# EAGLE board powermeter09 (EAGLE 9.1.3)
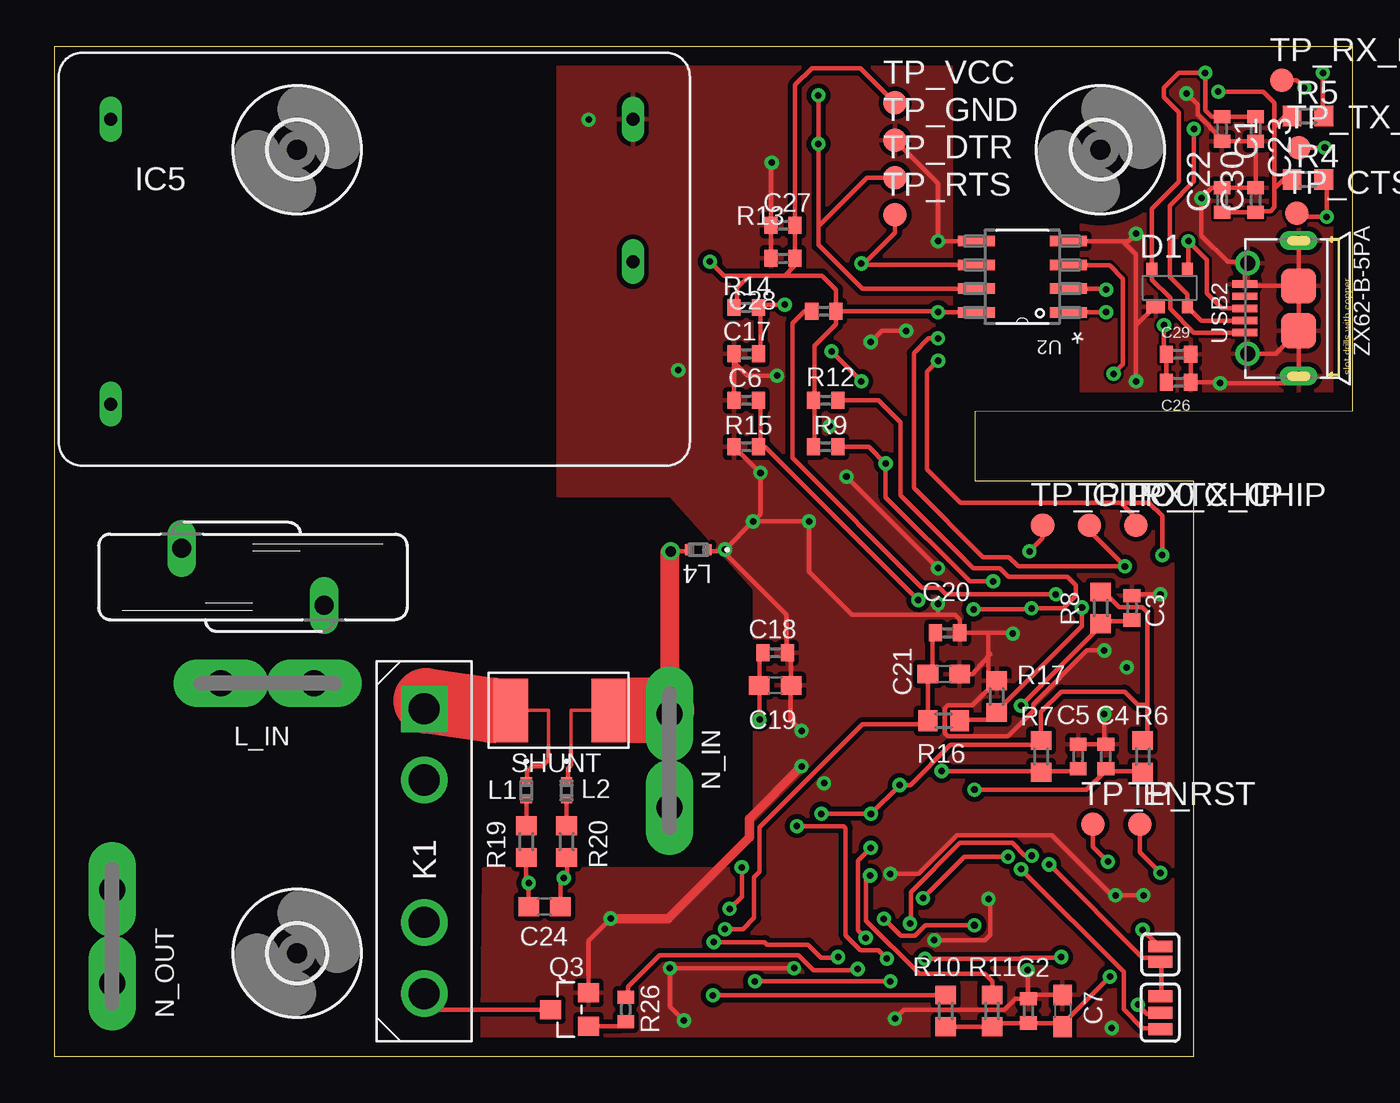
[diagram p0: board, top side]
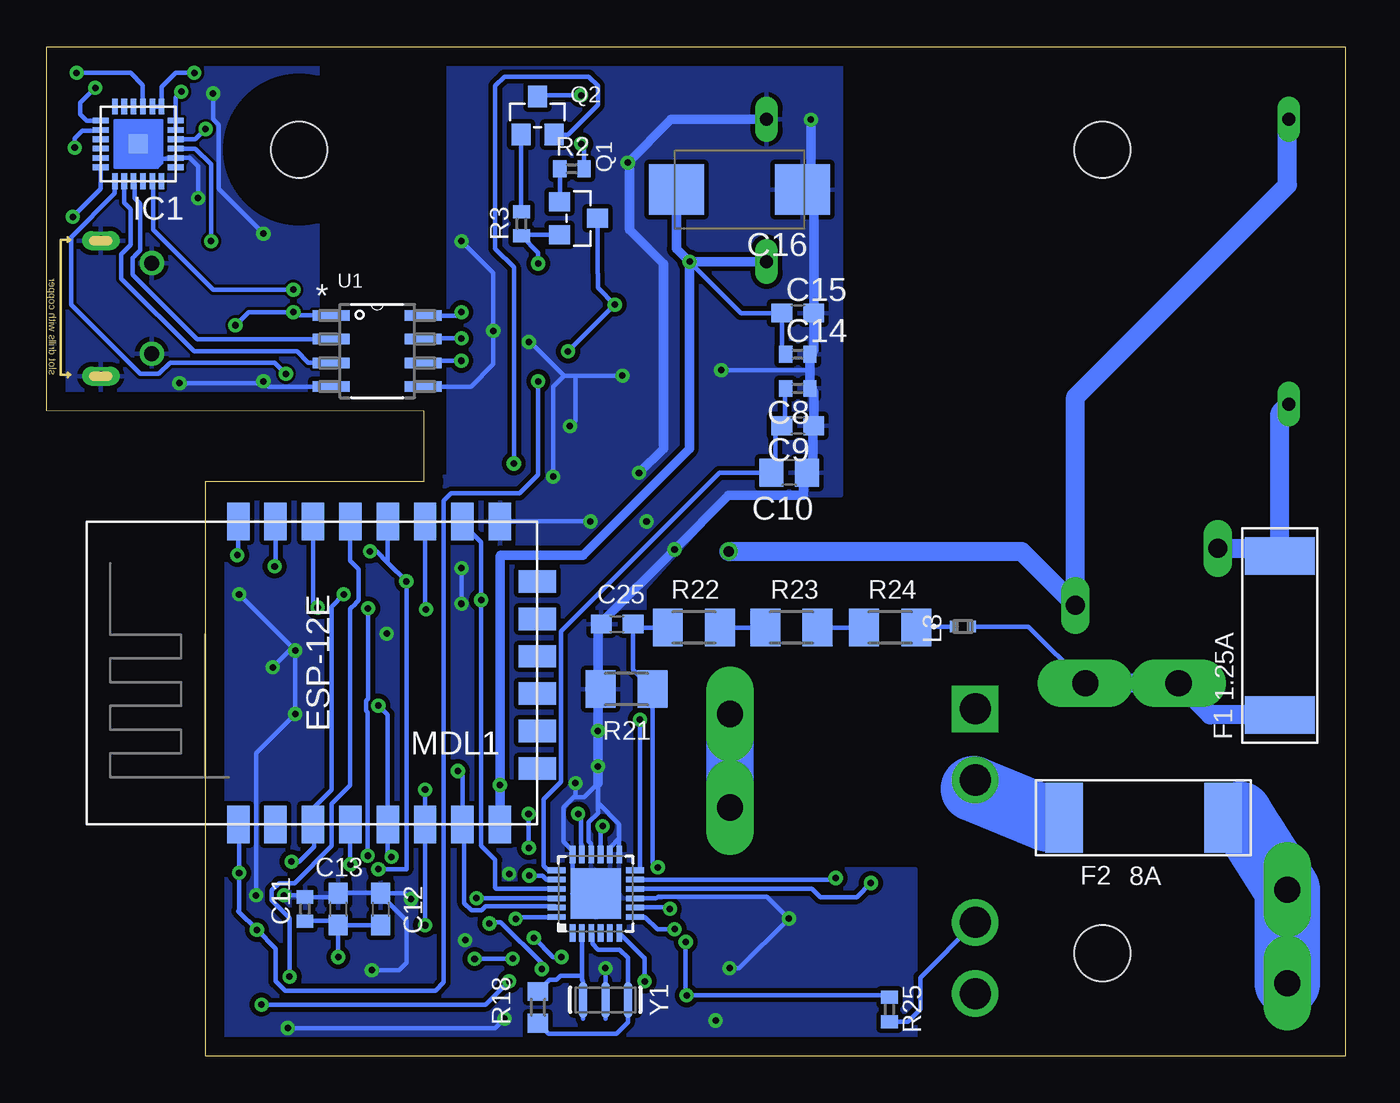
[diagram p1: board, bottom side, seen from below]

Size 69.5 x 54 mm. Coordinates in mm from the lower left corner, seen from the top.
Outline: 0,0 61,0 61,30.75 49.3,30.75 49.3,34.5 69.5,34.52 69.5,54 0,54 0,0
Copper layers (1*16): Top 0.035mm / dielectric 1.5mm / Bottom 0.035mm
Design rules "default": minimum track width 6mil, minimum drill 0.35mm, track to track 6mil, track to pad 6mil, pad to pad 6mil, via to via 6mil, smd to smd 6mil, copper to edge 40mil, drill to drill 6mil, minimum pad ring 10mil, minimum via ring 8mil, stop-mask expansion 4mil, vias tented up to drill 0mil, thermal gap 10mil
tKeepout: area 49.2,34.1 to 54,44.4
bKeepout: area 49.2,34.1 to 54,44.4

## Footprints (pad centres in the part's own frame; a part is rotated, then mirrored left to right if it is on the bottom)
C0402 = smd 0.7 x 0.9: 1 -0.65,0; 2 0.65,0
C0603 = smd 1.1 x 1: 1 -0.85,0; 2 0.85,0
C0805 = smd 1.3 x 1.5: 1 -0.95,0; 2 0.95,0
D/7343-31W = smd 2.95 x 2.7: + 3.375,0; - -3.375,0
SOT143-4-R = smd 1 x 0.7: 1 -0.75,-1 | smd 0.6 x 0.7: 2 0.95,-1; 3 0.95,1; 4 -0.95,1
SMD_FUSE = smd 2 x 3.75: P$1 -8.5,0; P$2 0,0
3,0 = hole 3: 0,0
QFN24 = smd 0.85 x 0.3: 1 -2,1.25; 2 -2,0.75; 3 -2,0.25; 4 -2,-0.25; 5 -2,-0.75; 6 -2,-1.25; 13 2,-1.25; 14 2,-0.75; 15 2,-0.25; 16 2,0.25; 17 2,0.75; 18 2,1.25 | smd 0.3 x 0.85: 7 -1.25,-2; 8 -0.75,-2; 9 -0.25,-2; 10 0.25,-2; 11 0.75,-2; 12 1.25,-2; 19 1.25,2; 20 0.75,2; 21 0.25,2; 22 -0.25,2; 23 -0.75,2; 24 -1.25,2 | smd 1.02 x 1.02: PAD 0,0
MW_IRM-02 = drill 0.7 long: +V 13.97,0; -V 13.97,7.62; AC/L -13.97,-7.62; AC/N -13.97,7.62
TO381P516X1991X2388-4P = drill 1.66 pad 2.49 square: 1 -1.27,0 | drill 1.66 pad 2.49: 2 2.54,0; 3 10.16,0; 4 13.97,0
IND_1005 = smd 0.423 x 0.6: 1 -0.492,0; 2 0.492,0
F061.100 = drill 1.4 pad 2.54 long: A1 -2.5,0; A2 2.5,0
ESP8266-ESP12E = smd 2 x 1.2: 1 -7.62,5.84; 2 -7.62,3.84; 3 -7.62,1.84; 4 -7.62,-0.16; 5 -7.62,-2.16; 6 -7.62,-4.16; 7 -7.62,-6.16; 8 -7.62,-8.16; 9 8.58,-8.16; 10 8.58,-6.16; 11 8.58,-4.16; 12 8.58,-2.16; 13 8.58,-0.16; 14 8.58,1.84; 15 8.58,3.84; 16 8.58,5.84 | smd 1.2 x 2: 17 -4.62,-10.16; 18 -2.62,-10.16; 19 -0.62,-10.16; 20 1.38,-10.16; 21 3.38,-10.16; 22 5.38,-10.16
SOT-23 = smd 1.016 x 1.143: 1 -0.889,-1.016; 2 0.889,-1.016; 3 0,1.016
S14K250 = drill 1.016 long: 1 -1.524,-3.81; 2 1.524,3.81
R0402 = smd 0.7 x 0.9: 1 -0.65,0; 2 0.65,0
R0603 = smd 1 x 1.1: 1 -0.85,0; 2 0.85,0
M1206 = smd 1.6 x 2: 1 -1.4,0; 2 1.4,0
SMD_SHUNT = smd 1.8 x 3.4: I_IN 0.2,0; I_OUT 5.4,0 | smd 0.203 x 0.406: SEN1 2.2,-2.3; SEN2 3.4,-2.3
SJ_3 = smd 0.635 x 1.27: 1 -0.889,0; 2 0,0; 3 0.889,0
SJ_2S = smd 0.635 x 1.27: 1 -0.412,0; 2 0.412,0
B1,27 = smd 1.27 x 1.27: TP 0,0
SOIC_8_PASCAL = smd 1.981 x 0.559: 1 0.076,-0.635; 2 0.076,-1.905; 3 0.076,-3.175; 4 0.076,-4.445; 5 5.004,-4.445; 6 5.004,-3.175; 7 5.004,-1.905; 8 5.004,-0.635
QFN24' = smd 0.95 x 0.3: 1 -2.1,1.25; 2 -2.1,0.75; 3 -2.1,0.25; 4 -2.1,-0.25; 5 -2.1,-0.75; 6 -2.1,-1.25; 13 2.1,-1.25; 14 2.1,-0.75; 15 2.1,-0.25; 16 2.1,0.25; 17 2.1,0.75; 18 2.1,1.25 | smd 0.3 x 0.95: 7 -1.25,-2.1; 8 -0.75,-2.1; 9 -0.25,-2.1; 10 0.25,-2.1; 11 0.75,-2.1; 12 1.25,-2.1; 19 1.25,2.1; 20 0.75,2.1; 21 0.25,2.1; 22 -0.25,2.1; 23 -0.75,2.1; 24 -1.25,2.1 | smd 2.7 x 2.7: EXP 0,0
MICRO-USB5+6P-SMD-0.65-AB = smd 0.4 x 1.35: 1 -1.3,2.875; 2 -0.65,2.875; 3 0,2.875; 4 0.65,2.875; 5 1.3,2.875 | smd 1.9 x 1.9: P1 -1.2,0; P2 1.2,0 | drill 0.508 pad 1.016 long: P3 -3.625,0; P4 3.625,0 | drill 0.8: P5 -2.425,2.73; P6 2.425,2.73
RESONATOR-SMD-3.2X1.3 = smd 0.45 x 1.905: 1 -1.2,0; 2 0,0; 3 1.2,0

## Placement (x,y rotation side)
C1  100n  [C0402]  62.5,49.6 270 top
C2  150p  [C0402]  52.14,2.42 270 top
C3  150p  [C0402]  57.68,23.98 270 top
C4  150p  [C0402]  56.28,16.03 270 top
C5  150p  [C0402]  54.8,16.03 270 top
C6  150p  [C0402]  37.03,35.08 0 top
C7  10n  [C0603]  53.96,2.42 270 top
C8  150p  [C0402]  29.3,35.72 180 bottom
C9  100n  [C0603]  29.3,33.72 180 bottom
C10  4.7u  [C0805]  29.76,31.22 180 bottom
C11  150p  [C0402]  55.68,7.86 270 bottom
C12  100n  [C0603]  51.63,7.86 270 bottom
C13  1u  [C0603]  53.91,7.86 270 bottom
C14  150p  [C0402]  29.3,37.55 0 bottom
C15  100n  [C0603]  29.3,39.75 0 bottom
C16  100u  [D/7343-31W]  32.42,46.36 180 bottom
C17  150p  [C0402]  37.03,37.57 180 top
C18  150p  [C0402]  38.59,21.58 180 top
C19  100n  [C0603]  38.59,19.83 180 top
C20  150p  [C0402]  47.81,22.64 180 top
C21  100n  [C0603]  47.61,20.44 180 top
C22  100n  [C0402]  62.5,45.8 90 top
C23  4.7u  [C0402]  64.3,49.6 270 top
C24  10n  [C0603]  26.24,7.99 180 top
C25  22n  [C0603]  38.97,23.11 0 bottom
C26  100n  [C0402]  60.17,36.05 180 top
C27  100n  [C0402]  39.01,44.45 0 top
C28  100n  [C0402]  39.01,42.68 0 top
C29  100n  [C0402]  60.17,37.55 180 top
C30  4.7u  [C0402]  64.3,45.8 90 top
D1  SP0503BAHTG  [SOT143-4-R]  59.7,41.1 0 top
F1  1.25A  [SMD_FUSE]  3.5,26.75 90 bottom
F2  8A  [SMD_FUSE]  15.05,12.75 180 bottom
H1  MOUNT-HOLE3.0  [3,0]  56,48.5 0 top
H3  MOUNT-HOLE3.0  [3,0]  13,48.5 0 top
H4  MOUNT-HOLE3.0  [3,0]  13,5.5 0 top
IC1  CP2102N-QFN24  [QFN24]  64.6,48.8 180 bottom
IC5  IRM-02-3.3  [MW_IRM-02]  17,42.5 0 top
K1  CPC1998J  [TO381P516X1991X2388-4P]  19.8,17.31 270 top
L1  MMZ1005A152ET000  [IND_1005]  25.27,14.22 270 top
L2  MMZ1005A152ET000  [IND_1005]  27.42,14.22 270 top
L3  MMZ1005A152ET000  [IND_1005]  20.47,22.98 0 bottom
L4  MMZ1005A152ET000  [IND_1005]  34.47,27.09 180 top
L_IN  PIN2F061.100  [F061.100]  11.42,19.94 180 top
MDL1  [ESP8266-ESP12E]  53.41,20.01 90 bottom
N_IN  PIN2F061.100  [F061.100]  32.94,15.8 90 top
N_OUT  PIN2F061.100  [F061.100]  3.1,6.4 90 top
Q1  S8050  [SOT-23]  41.04,44.82 270 bottom
Q2  S8050  [SOT-23]  43.24,50.32 0 bottom
Q3  S8050  [SOT-23]  27.58,2.49 90 top
R1  S14K250  [S14K250]  10.63,25.64 270 top
R2  12k  [R0402]  41.39,47.47 0 bottom
R3  12k  [R0402]  44.09,44.53 270 bottom
R4  10k  [R0603]  67.1,46.9 0 top
R5  1k  [R0603]  67.1,50.3 0 top
R6  10k  [R0603]  58.26,16.03 90 top
R7  10k  [R0603]  52.82,16.03 90 top
R8  10k  [R0603]  56.01,23.98 90 top
R9  12k  [R0402]  41.29,32.6 0 top
R10  10k  [R0603]  47.71,2.42 90 top
R11  100R  [R0603]  50.19,2.42 270 top
R12  12k  [R0402]  41.29,35.08 0 top
R13  12k  [R0402]  41.19,39.85 180 top
R14  12k  [R0402]  37.03,40.05 0 top
R15  12k  [R0402]  37.03,32.6 180 top
R16  100RR3  [R0603]  47.61,17.94 0 top
R17  22k  [R0603]  50.44,19.23 270 top
R18  1M  [R0603]  43.21,2.61 270 bottom
R19  1k  [R0603]  25.27,11.47 270 top
R20  1k  [R0603]  27.42,11.47 270 top
R21  470R  [M1206]  38.47,19.63 0 bottom
R22  270k  [M1206]  34.86,22.93 0 bottom
R23  270k  [M1206]  29.64,22.93 0 bottom
R24  270k  [M1206]  24.36,22.93 0 bottom
R25  220  [R0402]  24.4,2.49 90 bottom
R26  10k  [R0402]  30.59,2.49 90 top
SHUNT  WSLF2512L3000FEA  [SMD_SHUNT]  24.25,18.5 0 top
SJ1  0 / INT1 /16  [SJ_3]  59.2,2.32 90 top
SJ2  sleep mode  [SJ_2S]  59.2,5.45 270 top
TP_CTS_PORT  TPB1,27  [B1,27]  66.5,45.1 0 top
TP_DTR  TPB1,27  [B1,27]  45,47 0 top
TP_EN  TPB1,27  [B1,27]  55.6,12.4 0 top
TP_GIPO0  TPB1,27  [B1,27]  52.9,28.4 0 top
TP_GND  TPB1,27  [B1,27]  45,49 0 top
TP_RST  TPB1,27  [B1,27]  58.1,12.4 0 top
TP_RTS  TPB1,27  [B1,27]  45,45 0 top
TP_RX_CHIP  TPB1,27  [B1,27]  55.4,28.4 0 top
TP_RX_PORT  TPB1,27  [B1,27]  65.7,52.2 0 top
TP_TX_CHIP  TPB1,27  [B1,27]  57.9,28.4 0 top
TP_TX_PORT  TPB1,27  [B1,27]  66.6,48.6 0 top
TP_VCC  TPB1,27  [B1,27]  45,51 0 top
U1  SI8621BB-B-IS  [SOIC_8_PASCAL]  54.35,40.26 0 bottom
U2  SI8620BB-B-IS  [SOIC_8_PASCAL]  54.35,39.15 180 top
U$1  STPM32SMD  [QFN24']  40.11,8.69 90 bottom
USB2  ZX62-B-5PA  [MICRO-USB5+6P-SMD-0.65-AB]  66.6,40 90 top
Y1  CSTCE16M0V53-R0  [RESONATOR-SMD-3.2X1.3]  39.6,3 0 bottom

## Library data of the parts
C1-C30 = rcl
D1 = littelfuse_greg; OC_MOUSER: 576-SP0503BAHTG
F1 F2 SHUNT U1 U2 U$1 = _powermeter
H1 H3 H4 = holes
IC1 = silabs_greg; OC_MOUSER: 634-CP2102NA01GQFN24
IC5 = reichelt_power; OC_MOUSER: 709-IRM02-3.3
K1 = CPC1998J; DESCRIPTION: Solid State Relays - PCB Mount SP AC Solid State Power Switch; HEIGHT: 5.156mm; MANUFACTURER_NAME: IXYS SEMICONDUCTOR; MANUFACTURER_PART_NUMBER: CPC1998J; SUPPLIER_NAME: RS
L1-L4 = _powermeter; MANUFACTURER_PART_NUMBER: MMZ1005A152ET000; VENDOR: TDK
L_IN N_IN N_OUT = con-faston; OC_FARNELL: unknown; OC_NEWARK: unknown
MDL1 = ESP8266-ESP12E
Q1-Q3 = Seeed-Transistor; MPN: S8050
R1 = varistor
R2-R26 = resistor
SJ1 SJ2 = SparkFun-Retired
TP_CTS_PORT TP_DTR TP_EN TP_GIPO0 TP_GND TP_RST TP_RTS TP_RX_CHIP TP_RX_PORT TP_TX_CHIP TP_TX_PORT TP_VCC = testpad
USB2 = Seeed-OPL-Connector; MPN: ZX62-B-5PA; OC_MOUSER: 649-10118193-0001LF
Y1 = SparkFun-Clocks

## Nets
+3V3: C14.1 C15.1 C16.+ C27.2 C28.2 IC5.+V MDL1.8 R6.2 R7.2 R8.2 R9.1 R10.2 R12.1 R13.1 R14.1 R25.2 TP_VCC.TP U1.8 U2.8 U$1.17
AC_L: F1.P$1 L3.2 L_IN.A1 L_IN.A2
AC_L_FUSE1.25A: F1.P$2 IC5.AC/L R1.1
AC_N: IC5.AC/N L4.2 N_IN.A1 N_IN.A2 R1.2 SHUNT.I_OUT
AC_N_SHUNT: K1.1 SHUNT.I_IN
ADC: MDL1.2
CLK: MDL1.22
CP2102_3.3V1: C22.1 C30.1 IC1.5 IC1.6 R4.1 R5.1
CS0: MDL1.17
DC_GND1: C18.2 C19.2 U$1.12
DC_GND2: C20.2 C21.2 R16.1 U$1.7
DTR: Q2.3 R2.2 TP_DTR.TP U2.7
EN: MDL1.3 R13.2 TP_EN.TP
GND: C2.1 C3.1 C4.1 C5.1 C6.1 C7.1 C8.1 C9.1 C10.1 C11.1 C12.1 C13.1 C14.2 C15.2 C16.- C17.2 C18.1 C19.1 C20.1 C21.1 C25.1 C27.1 C28.1 IC5.-V L4.1 MDL1.9 Q3.2 R15.2 R17.1 R21.1 TP_GND.TP U1.5 U2.5 U$1.9 U$1.13 U$1.14 U$1.16 U$1.18 U$1.EXP Y1.2
GPIO0: MDL1.12 Q2.2 R9.2 SJ1.1 TP_GIPO0.TP
GPIO2: MDL1.11 R12.2 R26.2
GPIO4: C2.2 C7.2 MDL1.13 R10.1 R11.2
GPIO5: MDL1.14 R16.2 R17.2
GPIO9: MDL1.19
GPIO10: MDL1.20
GPIO12: C4.2 MDL1.6 R6.1 U$1.24
GPIO13: C5.2 MDL1.7 R7.1 U$1.23
GPIO14: C3.2 MDL1.5 R8.1 U$1.22
GPIO15: C6.2 MDL1.10 R15.1 U$1.21
GPIO16: MDL1.4 SJ1.3 SJ2.2
INT1: SJ1.2 U$1.6
ISO_5V: C26.2 C29.2 U1.1 U2.1
ISO_DTR: IC1.23 U2.2
ISO_GND: C1.2 C22.2 C23.2 C26.1 C29.1 C30.2 D1.1 IC1.2 IC1.PAD U1.4 U2.4 USB2.5 USB2.P1 USB2.P2 USB2.P3 USB2.P4 USB2.P5 USB2.P6
ISO_RTS: IC1.19 U2.3
ISO_RX: IC1.21 U1.2
ISO_TX: IC1.20 U1.3
MISO: MDL1.18
MOSI: MDL1.21
N$1: Q1.1 R2.1
N$2: Q2.1 R3.1
N$3: C8.2 C9.2 C10.2 U$1.19
N$4: IC1.18 R4.2 TP_CTS_PORT.TP
N$5: IC1.9 R5.2
N$6: C11.2 C12.2 C13.2 U$1.15
N$7: R18.2 U$1.3 Y1.3
N$8: R18.1 U$1.2 Y1.1
N$9: C24.1 R20.2 U$1.11
N$10: R11.1 U$1.20
N$11: C24.2 R19.2 U$1.10
N$12: Q3.1 R26.1
N$13: C25.2 R21.2 R22.1 U$1.8
N$14: R23.2 R24.1
N$15: R22.2 R23.1
N$16: F2.P$2 K1.2
N$17: K1.4 Q3.3
N$18: K1.3 R25.1
N$19: L3.1 R24.2
N$20: IC1.14 TP_TX_PORT.TP
N$21: L1.2 R19.1
N$22: L2.2 R20.1
N$23: F2.P$1 N_OUT.A1 N_OUT.A2
N$24: L1.1 SHUNT.SEN1
N$25: L2.1 SHUNT.SEN2
N$26: IC1.13 TP_RX_PORT.TP
NRST: C17.1 MDL1.1 Q1.3 R14.2 SJ2.1 TP_RST.TP
RTS: Q1.2 R3.2 TP_RTS.TP U2.6
RXD0: MDL1.15 TP_RX_CHIP.TP U1.7
TXD0: MDL1.16 TP_TX_CHIP.TP U1.6
USB_D+1: D1.3 IC1.3 USB2.3
USB_D-1: D1.2 IC1.4 USB2.2
VBUS: C1.1 C23.1 D1.4 IC1.7 IC1.8 USB2.1

## Tracks (layer width: path | path; a pad name or v marks a point on that pad's centre or on a via)
+3V3  (via drill 0.35)
  Top 0.254: 53,17 R7.2 | 58.25,17 R6.2 58.5,17 58.5,18.8 | 58.5,18.8 58.5,23.75 58.25,24 57,24 56.25,24.75 R8.2 | R9.1 40.7,32.7 40.7,34.95 R12.1 40.7,35.2 40.7,38 41.84,39.14 R13.1 | R14.1 36.55,40.2 36.55,41.1 37.2,41.75 | 41.6,40 R13.1 | 41.6,39.75 R13.1 | 39.1,41.75 37.2,41.75 | 39.1,41.75 41.1,41.75 41.84,41.01 R13.1 | 37.2,41.75 35.84,41.75 v35.09,42.5 | 52.75,16.75 R7.2 | R7.2 52.82,18.42 53.9,19.5 57.3,19.5 58,18.8 58.5,18.8 | v41.06,12.96 v43.71,12.96 v45.25,14.5 45.82,14.5 47.98,16.66 52.6,16.66 R7.2 | 37.48,6.09 v35.31,6.09 v35.3,6.1 37.47,6.1 37.48,6.09 | 37.48,6.09 38.02,6.09 38.16,5.96 40.34,5.96 41.05,5.25 41.95,5.25 v41.95,5.3 | R10.2 47.69,3.25 v35.25,3.25 | v43.43,6.33 43.02,6.74 43.02,10.46 v43.7,11.14 | R13.1 41.84,40.21 | 39.1,41.75 39.66,42.3 C28.2 C27.2 39.66,51.95 40.56,52.86 43.14,52.86 TP_VCC.TP | R13.1 47.25,39.85 v47.3,39.8 49.33,39.8 U2.8
  Bottom 0.254: R25.2 24.5,3.25 v35.25,3.25 35.3,3.3 v35.3,6.1 | U$1.17 40.86,11.29 40.91,11.33 40.91,12.81 v41.06,12.96 | v41.95,5.3 42.4,5.3 v43.43,6.33 | v43.7,11.14 v43.7,12.95 v43.71,12.96 | U1.8 49.45,39.62 | C14.1 30.16,37.72 C15.1 | C15.1 | C15.1 32.34,39.75 v35.09,42.5 | 49.34,39.63 U1.8 | 47.4,39.8 v47.3,39.8 47.5,39.6 49.32,39.6 U1.8
  Bottom 0.508: 36.49,45.36 C16.+ | v35.1,42.49 v35.09,42.5 IC5.+V | v35.1,42.49 35.1,32.5 40.8,26.8 45.2,26.8 45.25,26.75 45.25,15.4 v45.25,14.5 MDL1.8 | 35.09,45.36 C16.+ | C16.+ 35.8,43.19 v35.1,42.49
AC_L
  Bottom 0.254: L3.2 16.96,22.98 L_IN.A1
  Bottom 1.016: L_IN.A1 L_IN.A2 7.23,18.25 F1.P$1
AC_L_FUSE1.25A
  Bottom 1.016: R1.1 3.91,27.16 F1.P$2 3.5,34.41 IC5.AC/L
AC_N  (via drill 0.55)
  Top 0.254: 32.94,16.56 N_IN.A2 | L4.2 33.89,27 v33,27
  Top 1.016: v33,27 32.94,26.94 N_IN.A2 32.7,17.8 32.5,18.5 | SHUNT.I_OUT 31,18.5
  Top 3.5: 31,18.5 32.5,18.5
  Bottom 1.016: IC5.AC/N 3.1,50.05 3.1,46.6 14.44,35.26 R1.2 17.32,27 v33,27
  Bottom 2.54: N_IN.A1 N_IN.A2
AC_N_SHUNT
  Top 1.016: SHUNT.I_IN 23.4,18.5 | K1.1 20.58,19.08 19.9,19
  Top 3.5: 23.4,18.5 19.9,19
CP2102_3.3V1  (via drill 0.35)
  Top 0.254: C22.1 C30.1 64.35,45.2 65.1,45.2 65.3,45.4 65.3,46.4 | v62.3,51.6 64.7,51.6 65.3,51 65.3,49.7 | 65.3,49.7 65.3,48.4 65.3,46.4 | R4.1 65.8,46.9 65.3,46.4 | R5.1 65.9,50.3 65.3,49.7
  Bottom 0.254: IC1.5 IC1.6 62.6,51.3 v62.3,51.6
DC_GND1  (via drill 0.35)
  Top 0.254: v37.75,18 37.75,19.75 C19.2 37.75,20 37.75,21.5 C18.2
  Bottom 0.254: U$1.12 37.75,10 v37.75,18
DC_GND2  (via drill 0.35)
  Top 0.254: C20.2 47,22.45 47,20.5 C21.2 46.75,20.25 46.75,18 R16.1 46.75,17.75 43.25,17.75 37.75,12.25 37.75,9.87 37.46,9.58 37.46,7.4 36.85,6.79 36.28,6.79 v35.89,6.79
  Bottom 0.254: U$1.7 37.47,7.44 36.82,6.79 36.28,6.79 v35.89,6.79
DTR  (via drill 0.35)
  Top 0.254: v40.9,51.4 40.9,49 41.1,48.8 v40.9,48.8 40.9,44.4 | U2.7 43.24,41.05 40.9,43.4 40.9,44.4 | TP_DTR.TP 43.5,47 40.9,44.4
  Bottom 0.254: v40.9,51.4 43.17,51.4 Q2.3 | R2.2 40.74,48.64 v40.9,48.8
EN  (via drill 0.35)
  Top 0.254: 40.35,39.75 R13.2 | R13.2 40.25,39.85 | R13.2 40.15,39.85 39.5,39.2 39.5,32 46.44,25.06 47.37,25.06 47.73,24.7 v53.6,24.7 | TP_EN.TP 55.6,11.2 v56.4,10.4
  Bottom 0.254: v53.6,24.7 54.25,24.05 54.25,14.25 55.25,13.25 MDL1.3 55.2,12.34 55.2,11.2 56,10.4 v56.4,10.4
GND  (via drill 0.35)
  Top 0.254: C28.1 C27.1 38.35,47.76 v38.4,47.8 | C18.1 39,21.75 | 52.06,3.17 C2.1 | 52.06,3.17 52,3.25 52.1,3.35 | Q3.2 28.6,6.17 v29.78,7.36 | C5.1 C4.1 56.2,16.76 v56.2,18.3 | v59.2,24.7 57.75,24.7 C3.1 | 50.01,21.4 50.01,20.51 R17.1 49.13,18.77 47.84,18.77 47.68,18.61 47.68,17.27 47.84,17.11 51.04,17.11 52.41,18.48 52.41,18.83 55.27,21.7 v56.2,21.7 | C21.1 49.15,20.44 50.01,21.4 | C20.1 50,22.64 50.01,22.63 50.01,21.6 | C6.1 C17.2 36.38,37.12 37.1,36.4 v38.69,36.4 | C2.1 52.34,3.27 C7.1 | 35.8,27 39.2,23.6 39.2,21.61 C18.1 | 35.8,27 v35.9,27.1 v37.4,28.6 | C18.1 39.44,21.38 C19.1 39.4,19.8 39.4,18 v40,17.4 | v52.1,4.6 52.1,3.21 52.06,3.17 | C2.1 51.44,3.07 50.86,2.49 45.49,2.49 v45,2 | v51.3,22.6 51.56,22.64 C20.1 | 50.01,21.6 50.01,21.4 | v39.6,4.7 v32.95,4.7 32.95,2.65 v33.7,1.9 | L4.1 35.05,27 35.8,27 | v37.4,28.6 v40.4,28.6 40.4,25.9 42.7,23.6 47.3,23.6 | C20.1 48.46,23.34 48.2,23.6 47.3,23.6 | 50.11,21.5 50.01,21.6 | 47.3,23.6 v47.3,24.2 | R15.2 37.78,31.2 v37.8,31.2 37.8,29 v37.4,28.6 | v45.6,38.8 44.3,38.8 v43.7,38.2 | U2.5 v47.3,43.6 47.3,46.7 TP_GND.TP | v47.1,6.2 49.8,6.2 50.1,6.5 50.1,8.3 v50,8.4 | v44.75,9.75 46.24,9.75 48.31,11.81 53.4,11.81 56.61,8.6 v56.8,8.6 v58.3,8.6 | v42.4,31 v47.3,26.1
  Top 0.508: v40,15.5 37.2,12.7 | 37.22,12.68 37.2,12.7 | 37.2,12.7 37.2,11.7 32.86,7.36 v29.78,7.36
  Bottom 0.254: 40,23 C25.1 39.75,23.25 | 40,19.75 R21.1 40,19.5 | 28.5,35.5 C8.1 28.75,35.75 | 28.5,33.75 C9.1 28.5,33.5 | 28.5,31.5 28.75,31.25 C10.1 29,31 | C12.1 51.75,8.75 53.75,8.75 C13.1 54,8.5 55.5,8.5 C11.1 55.77,8.6 v56.8,8.6 | 45.25,28.75 MDL1.9 v40.4,28.6 | C12.1 51.5,8.5 50.25,7.25 50.25,5 50.65,4.6 v52.1,4.6 | U$1.9 36.88,8.44 36.79,8.53 30.96,8.53 v29.78,7.36 32.44,4.7 v32.95,4.7 | 41.3,13.85 41.84,13.3 41.84,11.47 41.36,10.98 U$1.18 41.36,9.94 U$1.EXP | 41.3,13.85 40.76,13.85 40,14.6 40,13.55 | v58.3,8.6 58.3,16.2 v56.2,18.3 v56.2,21.7 | v56.2,21.7 v59.2,24.7 | v39.6,4.7 Y1.2 | U1.5 49.33,35.8 46.8,35.8 45.6,37 v45.6,38.8 45.6,41.9 v47.3,43.6 | U$1.13 38.86,11.65 | U$1.14 39.36,11.15 38.86,11.65 | U$1.16 40.36,11.36 40.5,11.5 40.5,12.5 40,13 40,13.55 | 40,13.55 38.86,12.41 38.86,11.65 | v33.4,36.7 28.65,36.7 | v38.69,36.4 41.2,36.4 | 41.2,36.4 41.2,34 v41.5,33.7 | v47.3,24.2 v47.3,26.1 | v43.7,38.2 43.6,38.2 41.8,36.4 | 41.2,36.4 41.8,36.4 | 41.8,36.4 42.4,35.8 v42.4,31 | v56.2,21.7 56.5,21.7 v57.4,20.8 | C12.1 50.31,8.71 v50,8.4 | v56.6,1.5 45.5,1.5 v45,2 | v41.2,14.6 41.2,13.95 41.3,13.85
  Bottom 0.508: 40,19.75 40,23 | 40,19.5 v40,17.4 v40,15.5 40,14.6 | 28.5,33.5 28.5,31.5 | 39.75,23.25 v35.9,27.1 33,30 29,30 29,31 | C16.- 29.2,46.51 | 28.61,37.47 C14.2 | 30.99,50.14 IC5.-V 36.08,50.12 v38.4,47.8 38.3,47.7 38.3,44.2 36.5,42.4 36.5,32.5 v37.8,31.2 | 28.46,45.48 C16.- | 28.6,46.51 C16.- | C14.2 28.45,37.75 C15.2 28.45,45.77 C16.- | C14.2 28.65,36.7 C8.1 28.45,35.52 C9.1 | v28.6,50.1 28.6,46.8 C16.-
  pour Top (isolate 0.254): 27,54 27,30 33,30 37.5,25 37.5,10 23,10 22.9,-1 61,-1 61,31 48,31 48,54
  pour Bottom (isolate 0.254): 27,54 27,30 33,30 37.5,25 37.5,10 23,10 23,-1 61,-1 61,31 48,31 48,54
GPIO0  (via drill 0.35)
  Top 0.254: 41.95,32.45 R9.2 43.6,32.6 v44.5,31.7 44.5,29.9 49,25.4 v50.25,25.4 | v51.75,10 57.25,4.5 57.25,2.5 58.25,1.5 59,1.5 SJ1.1 | TP_GIPO0.TP 52.9,27.7 v52.2,27
  Bottom 0.254: v51.75,10 50.25,10 v50.25,25.4 51.25,26.4 | 51.25,27.8 MDL1.12 51.25,26.4 | v44.5,31.7 44.5,42.2 45.5,43.2 45.5,51.9 45,52.4 40.5,52.4 40,51.9 40,50.9 41.6,49.3 Q2.2 | v52.2,27 51.85,27 51.25,26.4
GPIO2  (via drill 0.35)
  Top 0.254: 41.95,34.95 R12.2 44.12,35.08 45.3,33.9 45.3,30 49.2,26.1 50.6,26.1 51.06,25.64 54.23,25.64 54.69,25.18 54.69,24.61 54.02,23.95 v52.3,23.95 52.25,23.9 v49.2,23.9 | v52.32,10.72 51.96,10.72 51.27,11.41 48.48,11.41 45.84,8.77 45.84,7.13 v45.8,7.09 | R26.2 30.7,3.25 30.7,3.7 32.4,5.4 39.83,5.4 40.63,4.6 42.94,4.6 v43,4.66
  Bottom 0.254: v52.3,23.95 52.3,19.13 52.41,19.02 52.41,18.48 52.32,18.39 v52.32,10.72 | v43,4.66 43,4.96 45.2,7.16 45.73,7.16 v45.8,7.09 | MDL1.11 49.25,23.95 v49.2,23.9
GPIO4  (via drill 0.35)
  Top 0.254: 50.6,1.75 50.5,1.75 | 50.6,1.75 52,1.75 C2.2 52.25,1.75 53.75,1.75 C7.2 54,1.75 v56.5,4.25 | R10.1 R11.2 50.42,1.57 50.6,1.75
  Bottom 0.254: 53.25,23.92 53.25,14.5 54.25,13.5 54.25,11.25 56.24,9.26 57.07,9.26 57.46,8.87 57.46,8.33 56.5,7.37 v56.5,4.25 | MDL1.13 53.25,26.5 52.8,26.05 52.8,24.38 52.96,24.22 52.96,24.21 | 52.96,24.21 53.25,23.92 | 52.96,24.21 53.25,23.92
GPIO5  (via drill 0.35)
  Top 0.254: R16.2 48.5,18 50,18 50.25,18.25 R17.2 50.5,18.5 55,23 v55,24
  Bottom 0.254: v55,24 55.25,24.25 MDL1.14
GPIO12  (via drill 0.35)
  Top 0.254: v49.25,14.25 55.25,14.25 56.25,15.25 C4.2 56.5,15.25 58.25,15.25 R6.1 | v49.25,7 46.64,7 46.07,6.43 45.31,6.43 v44.4,7.34
  Bottom 0.254: v49.25,14.25 MDL1.6 v49.25,7 | U$1.24 44.3,7.44 v44.4,7.34
GPIO13  (via drill 0.35)
  Top 0.254: C5.2 54.75,15.25 53,15.25 R7.1 52.75,15.25 v47.5,15.25
  Bottom 0.254: v47.5,15.25 47.25,15 MDL1.7 47.16,12.3 47.16,8.18 46.77,7.79 46.23,7.79 46.01,8.01 42.28,8.01 U$1.23
GPIO14  (via drill 0.35)
  Top 0.254: C3.2 57.5,23.25 56.25,23.25 R8.1 56,23 v51.75,18.75 | v46.5,8.45 48.71,10.66 v51.05,10.66
  Bottom 0.254: v51.75,18.75 51.25,18.25 MDL1.5 51.25,10.86 v51.05,10.66 | U$1.22 v46.5,8.45
GPIO15  (via drill 0.35)
  Top 0.254: C6.2 37.8,34.95 37.8,32.7 R15.1 38.05,32.6 v46.25,24.4
  Bottom 0.254: 47.25,28.75 MDL1.10 47.25,28.5 46.25,27.5 v46.25,24.4 46.25,11.25 45.5,10.5 45.5,9 45.44,8.94 U$1.21
GPIO16  (via drill 0.35)
  Top 0.254: SJ1.3 59.25,3.25 59.25,5 SJ2.2 59,5.25 58.25,5.25 v53.25,10.25
  Bottom 0.254: MDL1.4 v53.25,10.25
INT1  (via drill 0.35)
  Top 0.254: v44.75,4 v37.5,4 | v58,2.75 58.5,2.25 59,2.25 SJ1.2
  Bottom 0.254: v37.5,4 37.5,5.25 37.52,5.25 U$1.6 | v58,2.75 46,2.75 v44.75,4
ISO_5V  (via drill 0.35)
  Top 0.254: C26.2 C29.2 59.4,37.47 v59.4,39.1 | U2.1 56.28,39.78 v56.3,39.8
  Bottom 0.254: U1.1 56.12,39.62 v56.3,39.8 58.7,39.8 v59.4,39.1
ISO_DTR  (via drill 0.35)
  Top 0.152: 56.24,41.05 v56.3,41
  Top 0.254: U2.2 56.24,41.05
  Bottom 0.152: 63.8,46.75 IC1.23
  Bottom 0.254: v56.3,41 60.6,41 63.8,44.2 63.8,46.75
ISO_GND  (via drill 0.35)
  Top 0.254: C29.1 C26.1 | USB2.P2 63.83,41.2 USB2.5 63.73,42.28 USB2.P6 63.8,42.5 62.8,42.5 61.4,43.9 v61.4,45.9 61.95,46.45 C22.2 C30.2 C23.2 C1.2 62.5,49.05 61.19,50.36 61.19,50.91 v60.6,51.5 | USB2.P2 USB2.P4 | USB2.P1 USB2.P2 | USB2.P1 USB2.P3 66.58,36.38 66.2,36 v62.4,36 | USB2.P5 65.38,37.58 USB2.P1 | 57.2,43.59 U2.4 | C26.1 60.87,35.7 | 57.9,39.1 v57.9,36.1 | 57.9,39.1 58.9,40.1 D1.1 | 57.9,39.1 57.9,42.9 57.2,43.59 | v62.4,36 62.35,35.95 | C26.1 62.35,36.05 v62.4,36 | 57.2,43.59 57.49,43.59 v57.9,44
  Bottom 0.254: 54.29,35.8 U1.4 57.62,35.81 v57.9,36.1 | v61.4,45.9 61.4,47.6 61.85,48.05 IC1.2 62.65,48 63.3,48 64.1,48.8 IC1.PAD | v57.9,36.1 57.9,35.95 | v62.4,36 58,36 v57.9,36.1 | v60.6,51.5 60.6,50.13 60.29,49.82 60.29,46.39 v57.9,44
  pour Top: 55,34 55,54 70,54 70,34
  pour Bottom: 55,34 55,54 70,54 70,34
ISO_RTS  (via drill 0.35)
  Top 0.152: U2.3 54.3,42.3
  Top 0.254: 54.3,42.3 56.5,42.3 57.2,41.6 57.2,37 v56.7,36.5
  Bottom 0.254: v56.7,36.5 57.3,37.1 62.9,37.1 63.5,36.5 64.5,36.5 68.2,40.2 68.2,43.8 65.85,46.15 IC1.19
ISO_RX
  Bottom 0.152: IC1.21 64.8,46.75
  Bottom 0.254: U1.2 56.1,38.35 61.45,38.35 64.9,41.8 64.9,42.7 64.8,42.8 64.8,42.81 64.5,43.12 64.5,45.6 64.8,45.9 64.8,46.75
ISO_TX
  Bottom 0.152: U1.3 54.29,37.1
  Bottom 0.254: 54.29,37.1 55.5,37.1 56.1,37.7 56.3,37.7 61.6,37.7 65.5,41.6 65.5,42.9 65,43.4 65,45.3 65.2,45.5 65.35,45.65 IC1.20
N$1
  Bottom 0.254: 42.09,45.45 Q1.1 42.05,45.91 42.04,45.92 R2.1
N$2
  Bottom 0.254: Q2.1 44.12,45.22 R3.1
N$3
  Bottom 0.254: C8.2 30,35.5 30,33.75 C9.2 30.25,33.5 30.5,33.25 30.5,31.25 C10.2 30.73,31.2 33.5,31.2 41.97,22.73 41.97,14.67 42.91,13.73 42.91,10.17 42.68,9.94 U$1.19
N$4  (via drill 0.35)
  Top 0.254: 67.95,45.05 v68.1,44.9 | v68.1,44.9 66.7,44.9 TP_CTS_PORT.TP | v68.1,44.9 68.1,46.75 R4.2
  Bottom 0.254: IC1.18 66.6,46.4 v68.1,44.9
N$5  (via drill 0.35)
  Top 0.254: v67.9,52.6 67.9,50.35 R5.2
  Bottom 0.254: IC1.9 64.35,51.95 65,52.6 v67.9,52.6
N$6  (via drill 0.35)
  Top 0.254: v39.75,12.3 42.25,12.3 42.35,12.2 42.35,6.47 43.16,5.67 44.1,5.67 v44.56,5.21 | v46.6,5.2 51.77,5.2 51.83,5.26 53.86,5.26 v53.9,5.3
  Bottom 0.254: C11.2 55.5,7.25 54,7.25 C13.2 53.89,7.01 | 53.89,7.01 53.75,7 51.75,7 C12.2 51.5,7 51.6,6.9 | v53.9,5.3 53.9,7 53.89,7.01 | v44.56,5.21 v46.59,5.21 v46.6,5.2 | U$1.15 39.86,12.19 v39.75,12.3
N$7
  Bottom 0.254: R18.2 42.65,1.2 39,1.2 38.4,1.8 Y1.3 38.4,5.25 38.85,5.7 39.99,5.7 40.29,6 40.29,6.52 U$1.3
N$8
  Bottom 0.254: Y1.1 40.8,4 40.86,4.06 40.86,4.25 | R18.1 42.58,4.09 42.21,4.09 42,4.3 40.91,4.3 40.86,4.25 | 40.86,4.25 U$1.2
N$9  (via drill 0.35)
  Top 0.254: R20.2 27.45,10.59 27.45,9.7 v27.27,9.53 27.09,9.34 C24.1
  Bottom 0.254: U$1.11 27.36,9.44 v27.27,9.53
N$10  (via drill 0.35)
  Top 0.254: v43.67,9.66 43.45,9.43 43.45,7.25 46.3,4.4 49.8,4.4 50.2,4 R11.1
  Bottom 0.254: v43.67,9.66 42.97,9.66 42.76,9.44 U$1.20
N$11  (via drill 0.35)
  Top 0.254: R19.2 25.25,10.6 25.25,9.4 v25.39,9.26 C24.2
  Bottom 0.254: U$1.10 28.54,8.94 28.1,8.5 26.15,8.5 v25.39,9.26
N$12
  Top 0.254: Q3.1 30.35,1.6 R26.1
N$13  (via drill 0.35)
  Top 0.254: v36.8,10.1 36.8,8.53 v36.15,7.88
  Bottom 0.254: R22.1 37.94,22.93 C25.2 38.12,20.68 R21.2 37.07,10.37 v36.8,10.1 | U$1.8 37.94,7.96 37.93,7.95 36.5,7.95 36.42,7.88 v36.15,7.88
N$14
  Bottom 0.254: R24.1 R23.2
N$15
  Bottom 0.254: R23.1 R22.2
N$16
  Bottom 1.016: F2.P$2 15.25,12.25 16,12.7 | K1.2 19.9,14.3 19.8,13.7
  Bottom 3.5: 19.9,14.3 16,12.7
N$17
  Top 0.254: Q3.3 20.65,2.49 K1.4
N$18
  Bottom 0.254: K1.3 22.75,4.2 22.75,2.5 23.41,1.84 R25.1
N$19
  Bottom 0.254: 22.6,23.4 22.96,23.04 R24.2 22.91,22.98 L3.1
N$20  (via drill 0.35)
  Top 0.254: TP_TX_PORT.TP v68,48.6
  Bottom 0.254: IC1.14 66.65,49.5 67.6,49.5 68,49.1 v68,48.6
N$21
  Top 0.254: L1.2 R19.1
N$22
  Top 0.254: L2.2 R20.1
N$23
  Bottom 1.016: 5.7,11.8 N_OUT.A2 | F2.P$1 5.65,12.95 5,12.8
  Bottom 3.5: 5.65,12.95 5,11.9 N_OUT.A2 N_OUT.A1
N$24
  Top 0.254: SHUNT.SEN1 26.45,15.85 26.1,15.5 25.6,15.5 25.3,15.2 25.3,14.74 L1.1
N$25
  Top 0.254: SHUNT.SEN2 27.65,15.55 27.5,15.4 27.5,14.79 L2.1
N$26  (via drill 0.35)
  Top 0.254: TP_RX_PORT.TP 66.5,52.2 v66.9,51.8
  Bottom 0.254: IC1.13 67.35,50.05 67.7,50.4 67.7,51 v66.9,51.8
NRST  (via drill 0.35)
  Top 0.254: v58.25,6.75 59,6 SJ2.1 | C17.1 37.8,37.7 37.8,39.95 R14.2 37.8,40.2 v39.1,40.2 | v41.6,37.7 v43.2,36.1 | TP_RST.TP 58.1,10.9 v59.2,9.8
  Bottom 0.254: v39.1,40.2 v41.6,37.7 41.62,37.69 | 39.12,40.22 v39.1,40.2 | Q1.3 40.02,41.88 40,41.86 40,41.1 v39.1,40.2 | v43.2,36.1 43.2,31.1 44.2,30.1 47.85,30.1 48.25,29.7 48.25,3.95 48.7,3.5 56.75,3.5 57.25,4 57.25,5.75 v58.25,6.75 59.25,7.75 59.2,7.8 v59.2,9.8 59.2,12.34 MDL1.1
RTS  (via drill 0.35)
  Top 0.254: 43.27,42.33 U2.6 | 43.27,42.33 v43.2,42.4 | TP_RTS.TP 45,44.05 43.27,42.33
  Bottom 0.254: Q1.2 44.04,43.93 R3.2 43.2,42.99 v43.2,42.4
RXD0  (via drill 0.35)
  Top 0.254: v47.3,38.4 46.8,38.4 46,37.6 46,30.4 49.7,26.7 51.1,26.7 51.6,26.2 v57.3,26.2 55.4,28.1 TP_RX_CHIP.TP
  Bottom 0.254: MDL1.15 57.25,26.05 v57.3,26.2 | v47.3,38.4 49.3,38.4 U1.7
TXD0  (via drill 0.35)
  Top 0.254: v47.31,37.2 46.71,36.6 46.7,36.6 46.7,31.4 48.49,29.61 57.1,29.61 | v59.3,26.8 59.3,28.9 58.59,29.61 57.1,29.61 | TP_TX_CHIP.TP 57.9,28.81 57.1,29.61
  Bottom 0.254: MDL1.16 59.25,26.85 v59.3,26.8 | v47.31,37.2 49.23,37.2 U1.6
USB_D+1  (via drill 0.35)
  Top 0.254: D1.3 60.7,42.15 v60.7,43.6 61.7,42.6 61.7,40.8 62.5,40 USB2.3
  Bottom 0.254: IC1.3 61.55,48.55 60.7,47.7 60.7,46.6 v60.7,43.6
USB_D-1  (via drill 0.35)
  Top 0.254: USB2.2 61.4,39.35 D1.2 60.65,40.75 59.7,41.7 59.7,45.5 61,46.8 v61,49.6
  Bottom 0.254: 62.55,49.1 IC1.4 61.55,49.05 v61,49.6
VBUS  (via drill 0.35)
  Top 0.254: C23.1 C1.1 61.95,50.25 61.6,50.6 v61.6,52.6 60.2,52.6 59.4,51.8 59.4,51.3 60.2,50.5 60.19,50.49 60.19,46.76 58.75,45.32 58.75,43.75 | 58.75,43.75 D1.4 58.75,41.55 59.73,40.57 59.73,39.97 61,38.7 USB2.1 | 58.75,43.75 58.7,43.8
  Bottom 0.254: IC1.8 IC1.7 63.35,51.85 62.6,52.6 v61.6,52.6